# EAGLE board PCB_v112 (EAGLE 9.7.0)
AUTHOR: Gabriel Marcano; LAST_DATE: 2021-09-08; REV: A; TITLE: Soil Power Sensor
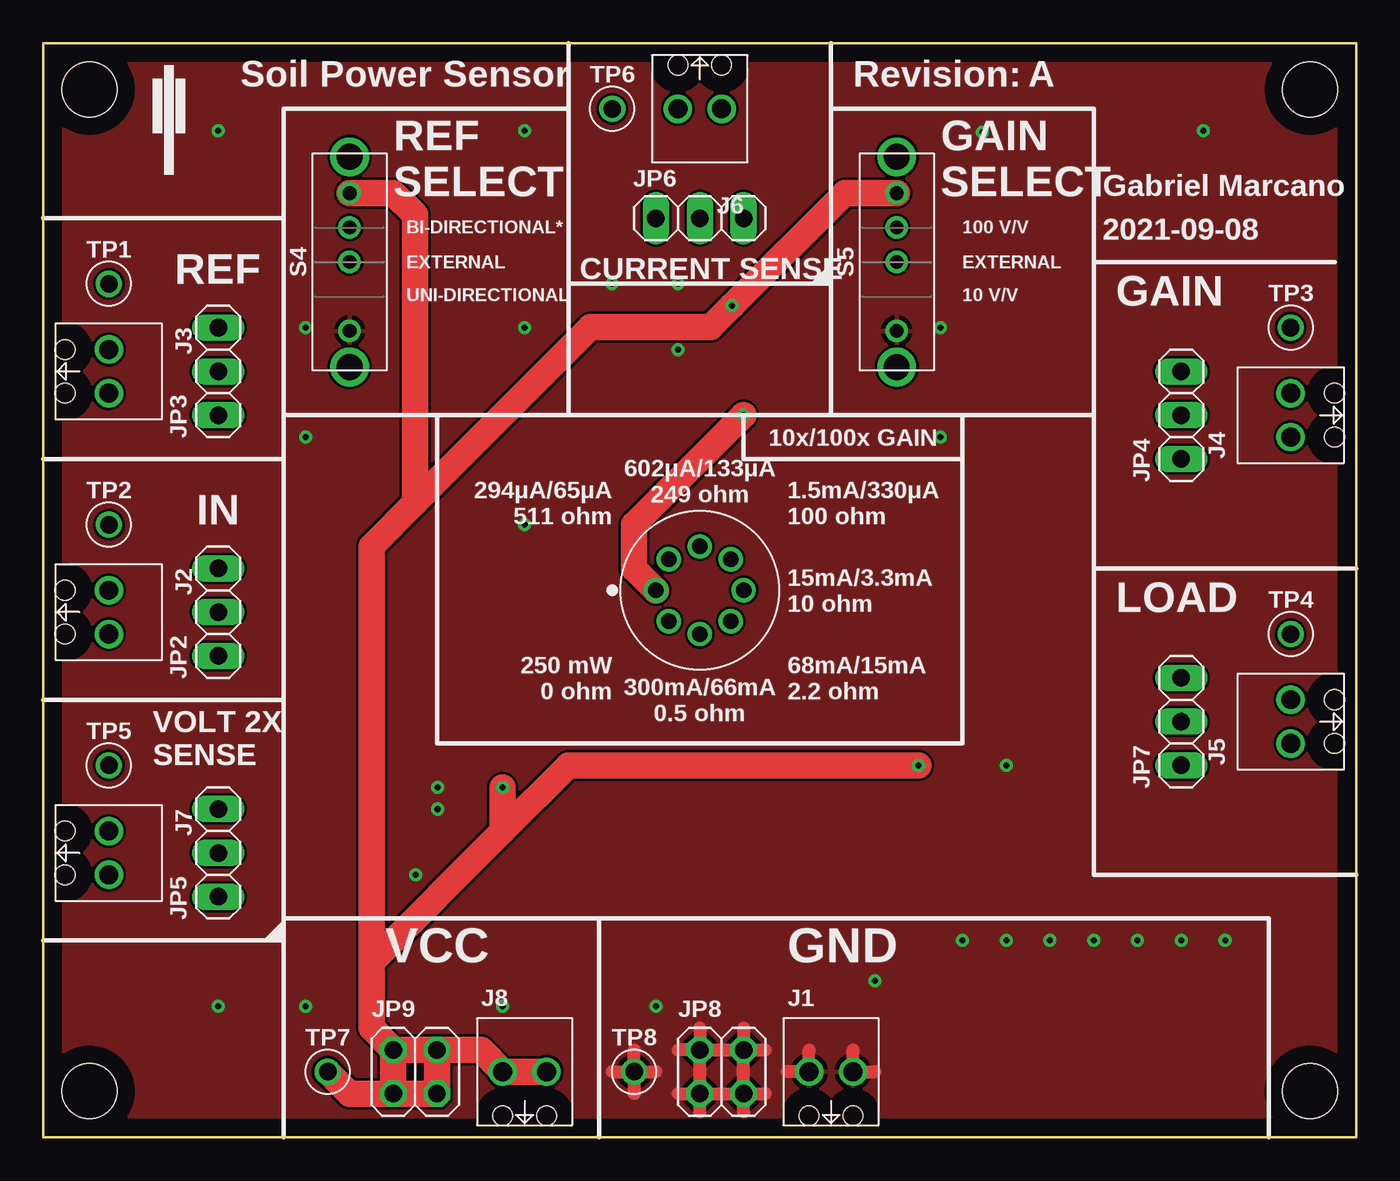
[diagram p0: board, top side]
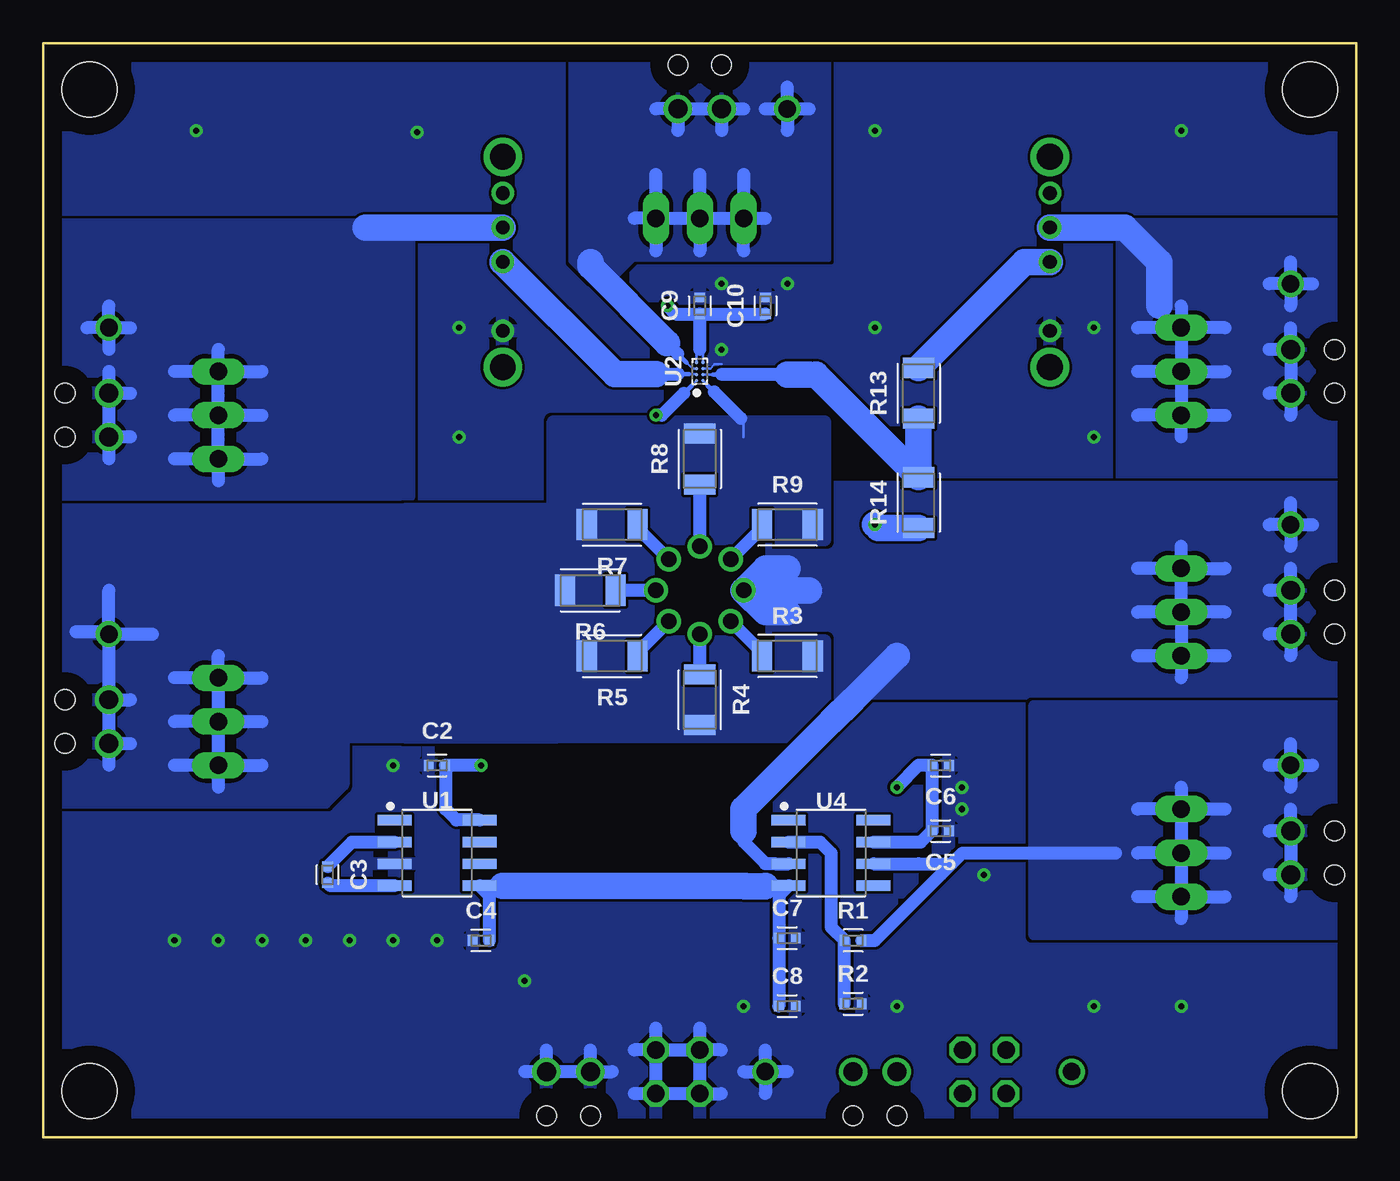
[diagram p1: board, bottom side, seen from below]

Size 76.2 x 63.5 mm. Coordinates in mm from the lower left corner, seen from the top.
Outline: 0,0 76.2,0 76.2,63.5 0,63.5 0,0
Copper layers (1*16): Top 0.035mm / dielectric 1.5mm / Bottom 0.035mm
Design rules "default": minimum track width 6mil, minimum drill 0.35mm, track to track 6mil, track to pad 6mil, pad to pad 6mil, via to via 6mil, smd to smd 6mil, copper to edge 40mil, drill to drill 6mil, minimum pad ring 10mil, minimum via ring 8mil, stop-mask expansion 4mil, vias tented up to drill 0mil, thermal gap 10mil
Holes 3.2 mm at 73.51,60.81 73.51,2.69 2.69,2.69 2.69,60.81

## Footprints (pad centres in the part's own frame; a part is rotated, then mirrored left to right if it is on the bottom)
CAPC1005X60 = smd 0.56 x 0.629: 1 -0.485,0; 2 0.485,0
CONN_BLOCK_2 = drill 1.1: 1 -1.27,0; 2 1.27,0 | hole 1.12: -1.27,-2.54; 1.27,-2.54
1X03 = drill 1.016 long: 1 -2.54,0; 2 0,0; 3 2.54,0
2X02 = drill 1.016 octagon: 1 -1.27,-1.27; 2 -1.27,1.27; 3 1.27,-1.27; 4 1.27,1.27
RESC1005X40 = smd 0.535 x 0.644: 1 -0.507,0; 2 0.507,0
RESC3216X70 = smd 1.165 x 1.815: 1 -1.475,0; 2 1.475,0
RMXXX77 = drill 0.9: P$1 0,2.54; P$2 -1.796,1.796; P$3 -2.54,0; P$4 -1.796,-1.796; P$5 0,-2.54; P$6 1.796,-1.796; P$7 2.54,0; P$8 1.796,1.796
OS102011MS8QP1 = drill 0.8: 1 -4,0; 2 0,0; 3 2,0; 4 4,0 | drill 1.5: MOUNT1 -6.1,0; MOUNT2 6.1,0
TESTPOINT_0.040IN = drill 1.016: TESTPOINT 0,0
SOIC127P599X175-8 = smd 1.968 x 0.602: 1 -2.47,1.905; 2 -2.47,0.635; 3 -2.47,-0.635; 4 -2.47,-1.905; 5 2.47,-1.905; 6 2.47,-0.635; 7 2.47,0.635; 8 2.47,1.905
BGA8C34P4X2_84X146X50 = smd 0.2 x 0.2: A1 -0.525,0.175; A2 -0.175,0.175; A3 0.175,0.175; A4 0.525,0.175; B1 -0.525,-0.175; B2 -0.175,-0.175; B3 0.175,-0.175; B4 0.525,-0.175

## Placement (x,y rotation side)
C2  10uF  [CAPC1005X60]  53.34,21.59 180 bottom
C3  10uF  [CAPC1005X60]  59.69,15.24 270 bottom
C4  10uF  [CAPC1005X60]  50.8,11.43 0 bottom
C5  0.1uF  [CAPC1005X60]  24.13,17.78 180 bottom
C6  2.2uF  [CAPC1005X60]  24.13,21.59 180 bottom
C7  0.1uF  [CAPC1005X60]  33.02,11.57 180 bottom
C8  2.2uF  [CAPC1005X60]  33.02,7.62 180 bottom
C9  0.1uF  [CAPC1005X60]  38.1,48.26 90 bottom
C10  4.7uF  [CAPC1005X60]  34.29,48.26 90 bottom
J1  SCREW-TERMINAL_2_0.100  [CONN_BLOCK_2]  45.72,3.81 0 top
J2  SCREW-TERMINAL_2_0.100  [CONN_BLOCK_2]  3.81,30.48 270 top
J3  SCREW-TERMINAL_2_0.100  [CONN_BLOCK_2]  3.81,44.45 270 top
J4  SCREW-TERMINAL_2_0.100  [CONN_BLOCK_2]  72.39,41.91 90 top
J5  SCREW-TERMINAL_2_0.100  [CONN_BLOCK_2]  72.39,24.13 90 top
J6  SCREW-TERMINAL_2_0.100  [CONN_BLOCK_2]  38.1,59.69 180 top
J7  SCREW-TERMINAL_2_0.100  [CONN_BLOCK_2]  3.81,16.51 270 top
J8  SCREW-TERMINAL_2_0.100  [CONN_BLOCK_2]  27.94,3.81 0 top
JP2  PINHD-1X3  [1X03]  10.16,30.48 90 top
JP3  PINHD-1X3  [1X03]  10.16,44.45 90 top
JP4  PINHD-1X3  [1X03]  66.04,41.91 90 top
JP5  PINHD-1X3  [1X03]  10.16,16.51 90 top
JP6  PINHD-1X3  [1X03]  38.1,53.34 0 top
JP7  PINHD-1X3  [1X03]  66.04,24.13 90 top
JP8  PINHD-2X2  [2X02]  39.37,3.81 0 top
JP9  PINHD-2X2  [2X02]  21.59,3.81 0 top
R1  402Ω  [RESC1005X40]  29.21,11.43 0 bottom
R2  402Ω  [RESC1005X40]  29.21,7.76 180 bottom
R3  0Ω  [RESC3216X70]  33.02,27.94 0 bottom
R4  0.5Ω  [RESC3216X70]  38.1,25.4 270 bottom
R5  2.2Ω  [RESC3216X70]  43.18,27.94 180 bottom
R6  10Ω  [RESC3216X70]  44.45,31.75 180 bottom
R7  100Ω  [RESC3216X70]  43.18,35.56 180 bottom
R8  249Ω  [RESC3216X70]  38.1,39.37 90 bottom
R9  511Ω  [RESC3216X70]  33.02,35.56 0 bottom
R13  10kΩ  [RESC3216X70]  25.4,43.18 90 bottom
R14  10kΩ  [RESC3216X70]  25.4,36.83 90 bottom
S1  RM100772BCB  [RMXXX77]  38.1,31.75 90 top
S4  OS103011MS8QP1  [OS102011MS8QP1]  17.78,50.8 90 top
S5  OS103011MS8QP1  [OS102011MS8QP1]  49.53,50.8 90 top
TP1  TEST_POINT_0.040IN  [TESTPOINT_0.040IN]  3.81,49.53 0 top
TP2  TEST_POINT_0.040IN  [TESTPOINT_0.040IN]  3.81,35.56 0 top
TP3  TEST_POINT_0.040IN  [TESTPOINT_0.040IN]  72.39,46.99 0 top
TP4  TEST_POINT_0.040IN  [TESTPOINT_0.040IN]  72.39,29.21 0 top
TP5  TEST_POINT_0.040IN  [TESTPOINT_0.040IN]  3.81,21.59 0 top
TP6  TEST_POINT_0.040IN  [TESTPOINT_0.040IN]  33.02,59.69 0 top
TP7  TEST_POINT_0.040IN  [TESTPOINT_0.040IN]  16.51,3.81 0 top
TP8  TEST_POINT_0.040IN  [TESTPOINT_0.040IN]  34.29,3.81 0 top
U1  LMC7660_SOIC8  [SOIC127P599X175-8]  53.34,16.51 0 bottom
U2  MAX40204_WPL8  [BGA8C34P4X2_84X146X50]  38.1,44.45 90 bottom
U4  OPA820_SOIC8  [SOIC127P599X175-8]  30.48,16.51 0 bottom
U$1  UCSD_TRIDENT_SOLID_250MIL  [UCSD_TRIDENT_SOLID_250MIL]  6.35,55.88 0 top

## Library data of the parts
C2-C4 = Capacitor; CATEGORY: Capacitor; DIGIKEY: 1276-1450-1-ND
C5 C7 C9 = Capacitor; CATEGORY: Capacitor; DIGIKEY: 1276-6720-1-ND
C6 C8 = Capacitor; CATEGORY: Capacitor; DIGIKEY: 1276-1469-1-ND
C10 = Capacitor; CATEGORY: Capacitor; DIGIKEY: 1276-1482-1-ND
J1-J8 = headers; DIGIKEY: 277-1273-ND; MOUSER: 651-1725656; NEWARK: 71C4107
JP2-JP7 = Connector; CATEGORY: CONNECTOR; DIGIKEY: 78511-403HLF-ND; SUB-CATEGORY: PIN-HEADER
JP8 JP9 = Connector; CATEGORY: CONNECTOR; DIGIKEY: S2012EC-01-ND; SUB-CATEGORY: PIN-HEADER
R1 R2 = Resistor; CATEGORY: Resistor; DIGIKEY: 2571-RM04F4020CTTR-ND; SUB-CATEGORY: Fixed; TOLERANCE: 1%
R3 = Resistor; CATEGORY: Resistor; DIGIKEY: 2679-HPCR1206-V-000TTR-ND; SUB-CATEGORY: Fixed; TOLERANCE: 1%
R4 = Resistor; CATEGORY: Resistor; DIGIKEY: CSR1206FKR500CT-ND; SUB-CATEGORY: Fixed; TOLERANCE: 1%
R5 = Resistor; CATEGORY: Resistor; DIGIKEY: 2997-CR082R20FTR-ND; SUB-CATEGORY: Fixed; TOLERANCE: 1%
R6 = Resistor; CATEGORY: Resistor; DIGIKEY: 2997-CR0810R0FTR-ND; SUB-CATEGORY: Fixed; TOLERANCE: 1%
R7 = Resistor; CATEGORY: Resistor; DIGIKEY: 2997-CR081000FTR-ND; SUB-CATEGORY: Fixed; TOLERANCE: 1%
R8 = Resistor; CATEGORY: Resistor; DIGIKEY: 2571-RM12F2490CTTR-ND; SUB-CATEGORY: Fixed; TOLERANCE: 1%
R9 = Resistor; CATEGORY: Resistor; DIGIKEY: 2997-CR085110FTR-ND; SUB-CATEGORY: Fixed; TOLERANCE: 1%
R13 R14 = Resistor; CATEGORY: Resistor; DIGIKEY: 2997-CR081002FTR-ND; SUB-CATEGORY: Fixed
S1 = Soil; DATASHEET: https://www.ckswitches.com/media/1910/rm.pdf; DESCRIPTION: Rotary Switch 8 Position SP7T 500mA (DC) AC Through Hole; DIGIKEY: CKN10691-ND; MANUFACTURER: C&K; MOUSER: 611-RM100772BCB; MPN: RM100772BCB
S4 S5 = switches; DIGIKEY: CKN9543-ND
TP1-TP8 = headers; DIGIKEY: 5001K-ND
U1 = Soil; DATASHEET: https://www.ti.com/lit/gpn/lmc7660; DESCRIPTION: Charge Pump Switching Regulator IC Negative Fixed -Vin 1 Output - 8-SOIC (0.154", 3.90mm Width); DIGIKEY: 2156-LMC7660IM-ND; MANUFACTURER: Texas Instruments; MPN: LMC7660IM/NOPB
U2 = Soil; DATASHEET: https://datasheets.maximintegrated.com/en/ds/MAX40204.pdf; DESCRIPTION: Current Sense Amplifier 1 Circuit - 8-WLP (1.47x0.85); DIGIKEY: 175-MAX40204ANA+-ND; MANUFACTURER: Maxim Integrated; MOUSER: 700-MAX40204ANA+; MPN: MAX40204ANA+
U4 = Soil; DATASHEET: https://www.ti.com/general/docs/suppproductinfo.tsp?distId=10&gotoUrl=https%3A%2F%2Fwww.ti.com%2Flit%2Fgpn%2Fopa820; DESCRIPTION: Voltage Feedback Amplifier 1 Circuit - 8-SOIC; DIGIKEY: 296-48640-1-ND; MANUFACTURER: Texas Instruments; MOUSER: 595-OPA820ID; MPN: OPA820ID
U$1 = logos

## Nets
GAIN: S5.2 U2.A2
GAIN_IN: J4.1 J4.2 JP4.1 JP4.2 JP4.3 S5.3 TP3.TESTPOINT
GND: C2.2 C4.1 C5.1 C6.1 C7.1 C8.1 C9.2 C10.2 J1.1 J1.2 JP8.1 JP8.2 JP8.3 JP8.4 R2.1 R14.1 S4.1 S5.1 TP8.TESTPOINT U1.3 U2.B3
I_OUT: J6.1 J6.2 JP6.1 JP6.2 JP6.3 TP6.TESTPOINT U2.A3
IN: J2.1 J2.2 JP2.1 JP2.2 JP2.3 S1.P$1 TP2.TESTPOINT U2.A1 U4.3
INX2_BUFFERED: J7.1 J7.2 JP5.1 JP5.2 JP5.3 R1.2 TP5.TESTPOINT U4.6
LOAD: J5.1 J5.2 JP7.1 JP7.2 JP7.3 R3.2 R4.2 R5.2 R6.2 R7.2 R8.2 R9.2 TP4.TESTPOINT U2.B1
N$1: C3.1 U1.2
N$2: C3.2 U1.4
N$3: R3.1 S1.P$2
N$4: R1.1 R2.2 U4.2
N$5: R4.1 S1.P$3
N$6: R5.1 S1.P$4
N$7: R6.1 S1.P$5
N$8: R7.1 S1.P$6
N$9: U1.6
N$10: R9.1 S1.P$8
N$11: R8.1 S1.P$7
N$12: U1.7
N$17: R13.2 S4.2
REF: R13.1 R14.2 U2.B2
REF_IN: J3.1 J3.2 JP3.1 JP3.2 JP3.3 S4.3 TP1.TESTPOINT
VCC: C2.1 C5.2 C6.2 C9.1 C10.1 J8.1 J8.2 JP9.1 JP9.2 JP9.3 JP9.4 S4.4 S5.4 TP7.TESTPOINT U1.8 U2.A4 U2.B4 U4.7
VSS: C4.2 C7.2 C8.2 U1.5 U4.4

## Tracks (layer width: path | path; a pad name or v marks a point on that pad's centre or on a via)
GAIN
  Bottom 0.152: U2.A2 38.3,44.3 38.73,44.3
  Bottom 0.254: 39.34,44.3 38.73,44.3
  Bottom 0.762: 40.64,44.3 39.34,44.3
  Bottom 1.524: S5.2 43.03,44.3 40.64,44.3
GAIN_IN
  Bottom 0.762: JP4.1 JP4.2 | JP4.2 JP4.3 | JP4.3 63.5,44.45 | JP4.3 66.04,45.72 | JP4.3 68.58,44.45 | JP4.2 68.58,41.91 | JP4.2 63.5,41.91 | JP4.1 63.5,39.37 | JP4.1 66.04,38.1 | JP4.1 68.58,39.37 | TP3.TESTPOINT 72.39,45.72 | J4.1 72.39,39.37 | 71.12,40.64 J4.1 | 72.39,44.45 J4.2 | J4.2 71.12,43.18 | J4.2 J4.1 | TP3.TESTPOINT 72.39,48.26 | TP3.TESTPOINT 73.66,46.99 | TP3.TESTPOINT 71.12,46.99
  Bottom 1.524: JP4.3 65.98,44.45 | 57.5,52.8 | 57.5,52.8 S5.3
  pour Bottom (rank 2): 54.99,37.21 75.82,37.21 75.82,52.96 54.99,52.96
GND  (via drill 0.35)
  Top 0.762: 38.1,6.35 JP8.2 | 40.64,6.35 JP8.4 | JP8.4 41.91,5.08 | 38.1,1.47 JP8.1 | 40.64,1.47 JP8.3 | JP8.3 41.91,2.54 | 33.02,3.81 TP8.TESTPOINT | TP8.TESTPOINT 34.29,5.08 | TP8.TESTPOINT 34.29,2.54 | JP8.2 36.85,5.08 | 36.85,2.54 JP8.1 | TP8.TESTPOINT 35.56,3.81 | JP8.1 JP8.3 | JP8.1 JP8.2 | JP8.3 JP8.4 | JP8.2 JP8.4 | 43.18,3.81 J1.1 44.45,5.08 | 46.99,5.08 J1.2 48.26,3.81
  Bottom 0.152: 36.83,44.88 37.23,44.88 37.49,44.62 U2.B3
  Bottom 0.762: JP8.3 41.91,2.54 | JP8.4 40.64,6.35 | JP8.2 38.1,6.35 | JP8.4 41.91,5.08 | 33.02,3.81 TP8.TESTPOINT | 35.56,3.81 TP8.TESTPOINT | TP8.TESTPOINT 34.29,2.54 | TP8.TESTPOINT 34.29,5.08 | JP8.4 JP8.2 | JP8.1 JP8.3 | JP8.1 JP8.2 | JP8.3 JP8.4 | 36.85,5.08 JP8.2 | JP8.1 36.85,2.54 | J1.1 43.18,3.81 | J1.1 44.45,5.08 | J1.2 48.26,3.81 | J1.2 46.99,5.08 | J1.1 J1.2
  Bottom 1.524: v27.94,35.56 27.73,35.35 R14.1
  other vias: 52.07,46.99 15.24,46.99 36.83,49.53 35.56,7.62 26.67,7.62 58.42,11.43 55.88,11.43 53.34,11.43 60.96,11.43 63.5,11.43 66.04,11.43 68.58,11.43 55.88,21.59 67.31,58.42 15.24,7.62 10.16,7.62 10.16,58.42 27.94,46.99 52.07,40.64 54.51,58.32 27.94,58.42 33.02,49.53 15.24,40.64 22.88,19.05 22.88,20.32 48.26,9.09 21.61,15.24 36.83,45.72
  pour Bottom (rank 6): 0.38,0.38 75.82,0.38 75.82,63.12 0.38,63.12
  pour Top (rank 6): 0.08,0.08 76.12,0.08 76.12,63.42 0.08,63.42
I_OUT
  Bottom 0.152: 38.86,44.96 38.53,44.62 U2.A3
  Bottom 0.254: 39.37,45.47 38.86,44.96
  Bottom 0.762: JP6.3 JP6.2 | JP6.3 40.64,55.88 | JP6.2 38.1,55.88 | JP6.3 41.91,53.34 | JP6.3 40.64,51.44 | JP6.2 38.1,51.44 | J6.1 40.64,59.69 | J6.1 J6.2 | J6.2 35.56,59.69 | J6.2 36.83,58.42 | J6.1 39.37,58.42 | 35.56,55.88 JP6.1 | JP6.2 JP6.1 | 35.56,51.44 JP6.1 | JP6.1 34.29,53.34 | 34.29,59.69 TP6.TESTPOINT | TP6.TESTPOINT 33.02,60.96 | TP6.TESTPOINT 31.75,59.69 | TP6.TESTPOINT 33.02,58.42 | 39.37,45.47 40.01,46.1
  Bottom 1.524: 40.01,46.1 44.45,50.55 44.45,50.8
  pour Bottom: 30.61,63.37 30.61,50.93 41.94,50.93 41.98,50.91 43.23,49.66 44.4,49.66 45.59,50.85 45.59,63.37
IN  (via drill 0.35)
  Top 1.524: v40.64,41.91 34.29,35.56 34.29,33.02 S1.P$1
  Bottom 0.152: 38.56,43.64 U2.A1
  Bottom 0.254: 38.56,43.64 39.02,43.18
  Bottom 0.762: JP2.3 10.16,34.29 | JP2.3 7.62,33.02 | JP2.2 JP2.3 | 7.62,27.94 JP2.1 | JP2.1 12.7,27.94 | JP2.1 10.16,26.67 | JP2.2 JP2.1 | 7.62,30.48 JP2.2 | JP2.2 12.7,30.48 | J2.2 5.08,29.21 | J2.2 3.81,27.94 | TP2.TESTPOINT 3.81,34.29 | J2.2 J2.1 | J2.1 5.08,31.75 | J2.1 3.81,33.02 | TP2.TESTPOINT 5.08,35.56 | TP2.TESTPOINT 3.81,36.83 | TP2.TESTPOINT 2.54,35.56 | 39.02,43.18 40.29,41.91 v40.64,41.91 | JP2.3 12.7,33.02 | 35.56,17.78 35.56,17.17 34.29,15.9 33.75,15.9 33.73,15.88 U4.3
  Bottom 1.524: S1.P$1 31.75,31.75 | S1.P$1 34.29,30.48 33.02,30.48 | S1.P$1 34.29,33.02 33.02,33.02 | 35.56,17.78 35.56,19.05 30.48,24.13 29.21,25.4 26.67,27.94
  pour Bottom (rank 2): 30.41,29.32 30.45,29.34 34.16,29.34 34.16,37.97 0.13,37.97 0.13,25.53 30.35,25.53 30.35,29.24 30.37,29.28
INX2_BUFFERED
  Bottom 0.762: 13.97,16.51 22.86,16.51 23.5,15.88 | TP5.TESTPOINT 3.81,20.32 | R1.2 27.94,11.43 24.13,15.24 23.5,15.88 | 10.16,20.32 JP5.3 | JP5.3 11.43,19.05 | JP5.3 8.89,19.05 | JP5.3 7.62,19.05 | JP5.3 12.7,19.05 | JP5.3 JP5.2 | JP5.2 7.62,16.51 | JP5.2 12.7,16.51 | JP5.2 JP5.1 | JP5.1 7.62,13.97 | JP5.1 12.7,13.97 | JP5.1 10.16,12.7 | TP5.TESTPOINT 2.54,21.59 | TP5.TESTPOINT 5.08,21.59 | TP5.TESTPOINT 3.81,22.86 | J7.1 3.81,19.05 | J7.1 5.08,17.78 | J7.2 3.81,13.97 | J7.2 5.08,15.24 | J7.1 J7.2 | U4.6 25.4,15.88 24.77,15.88 23.5,15.88
  pour Bottom: 0.38,11.81 18.67,11.81 18.67,25.02 0.38,25.02
LOAD
  Bottom 0.152: U2.B1 37.64,43.64 | 35.73,41.73 35.56,41.56 35.56,40.64
  Bottom 0.254: 37.26,43.26 37.64,43.64
  Bottom 0.762: JP7.3 JP7.2 | JP7.2 JP7.1 | J5.2 71.12,25.4 | J5.1 71.12,22.86 | J5.1 72.39,21.59 | JP7.3 68.58,26.67 | JP7.3 63.5,26.67 | JP7.3 66.04,27.94 | JP7.2 68.58,24.13 | JP7.1 68.58,21.59 | JP7.1 63.5,21.59 | J5.2 J5.1 | JP7.2 63.5,24.13 | JP7.1 66.04,20.32 | TP4.TESTPOINT 72.39,31.75 | TP4.TESTPOINT 72.52,29.34 74.3,29.34 | TP4.TESTPOINT 69.85,29.21 | TP4.TESTPOINT J5.2 | 37.26,43.26 35.73,41.73
  pour Bottom (no thermals): 34.52,28.91 34.44,28.85 34.34,28.83 30.86,28.83 30.86,23.24 46.61,23.24 46.61,41.53 30.86,41.53 30.86,34.67 34.34,34.67 34.44,34.65 34.52,34.59 34.59,34.52 34.65,34.44 34.67,34.34 34.67,29.16 34.65,29.06 34.59,28.98
  pour Bottom: 58.78,23.01 58.8,22.91 58.8,20.48 59.85,19.43 75.82,19.43 75.82,36.45 54.99,36.45 54.99,23.24 58.47,23.24 58.57,23.22 58.65,23.16 58.72,23.09
  pour Bottom: 46.48,23.62 55.12,23.62 55.12,36.07 46.48,36.07
N$1
  Bottom 0.762: C3.1 58.27,17.14 U1.2
N$2
  Bottom 0.762: C3.2 59.54,14.61 U1.4
N$3
  Bottom 0.762: S1.P$2 34.49,28.14 R3.1
N$4
  Bottom 0.762: R2.2 R1.1 30.48,12.19 30.48,16.51 31.11,17.14 U4.2
N$5
  Bottom 0.762: R4.1 S1.P$3
N$6
  Bottom 0.762: S1.P$4 41.7,28.14 R5.1
N$7
  Bottom 0.762: S1.P$5 R6.1
N$8
  Bottom 0.762: S1.P$6 41.7,35.35 R7.1
N$10
  Bottom 0.762: S1.P$8 34.49,35.35 R9.1
N$11
  Bottom 0.762: S1.P$7 R8.1
N$17
  Bottom 1.524: S4.2 19.25,50.8 R13.2
REF
  Bottom 0.152: 37.34,44.27 U2.B2
  Bottom 0.254: 31.37,44.27 31.75,44.27 | 36.83,44.27 37.34,44.27
  Bottom 0.762: 33.02,44.27 36.83,44.27
  Bottom 1.524: R13.1 R14.2 31.37,44.27 | 31.75,44.27 33.02,44.27
REF_IN
  Bottom 0.762: 10.16,48.26 JP3.3 | 7.62,46.99 JP3.3 | JP3.3 JP3.2 | JP3.2 JP3.1 | 10.16,40.64 JP3.1 | JP3.3 12.7,46.99 | JP3.1 12.7,41.91 | JP3.2 12.7,44.45 | JP3.1 7.62,41.91 | JP3.2 7.62,44.45 | J3.2 3.81,41.91 | J3.1 J3.2 | J3.1 3.81,46.99 | J3.2 5.08,43.18 | J3.1 5.08,45.72 | TP1.TESTPOINT 3.81,48.26 | TP1.TESTPOINT 5.08,49.53 | TP1.TESTPOINT 3.81,50.8 | TP1.TESTPOINT 2.54,49.53
  Bottom 1.524: S4.3 13.43,52.8 11.43,50.8 11.43,48.26
  pour Bottom (rank 3): 0.13,38.23 13.84,38.23 13.84,53.21 0.13,53.21
VCC  (via drill 0.35)
  Top 1.524: v50.8,21.59 30.48,21.59 26.67,17.78 | S5.4 46.52,54.8 v39.98,48.26 38.73,47.01 31.77,47.01 21.59,36.83 | 21.59,36.83 19.05,34.29 19.05,10.16 | 21.59,36.83 21.59,53.53 20.32,54.8 S4.4 | TP7.TESTPOINT 17.78,2.54 JP9.1 | JP9.4 JP9.2 | JP9.1 JP9.3 JP9.4 | 19.05,10.16 19.05,6.35 JP9.2 | 19.05,10.16 26.67,17.78 | 26.67,17.78 v26.67,20.32 | JP9.2 JP9.1 | JP9.4 25.4,5.08 J8.1 J8.2
  Bottom 0.152: U2.B4 37.92,45.55 38.1,45.72 38.27,45.55 U2.A4
  Bottom 0.254: C6.2 24.61,17.8 24.62,17.79
  Bottom 0.762: C9.1 C10.1 | v39.98,48.26 39.5,47.77 C9.1 | v50.8,21.59 C2.1 52.85,19.05 52.22,18.41 U1.8 | 24.62,17.79 25.27,17.14 U4.7 | C5.2 C6.2 25.4,21.59 v26.67,20.32 | 38.1,45.72 C9.1
VSS
  Bottom 0.762: C8.2 C7.2 33.51,14.05 U4.4 34.29,14.61 | C4.2 50.31,14.05 U1.5 49.53,14.61
  Bottom 1.524: 49.53,14.61 35.49,14.61 35.46,14.58 34.31,14.58 34.29,14.61

## Text on the board
tPlace: Revision: | REF / SELECT | GAIN / SELECT | BI-DIRECTIONAL* | 100 V/V | EXTERNAL | EXTERNAL | REF | CURRENT SENSE | UNI-DIRECTIONAL | 10 V/V | GAIN | 10x/100x GAIN | 602μA/133μA / 249 ohm | IN | 294μA/65μA / 511 ohm | 1.5mA/330μA / 100 ohm | 15mA/3.3mA / 10 ohm | LOAD | 250 mW / 0 ohm | 68mA/15mA / 2.2 ohm | 300mA/66mA / 0.5 ohm | VOLT 2X / SENSE | VCC | GND